# EAGLE board 2-28-13 x1_2 (EAGLE 6.3)
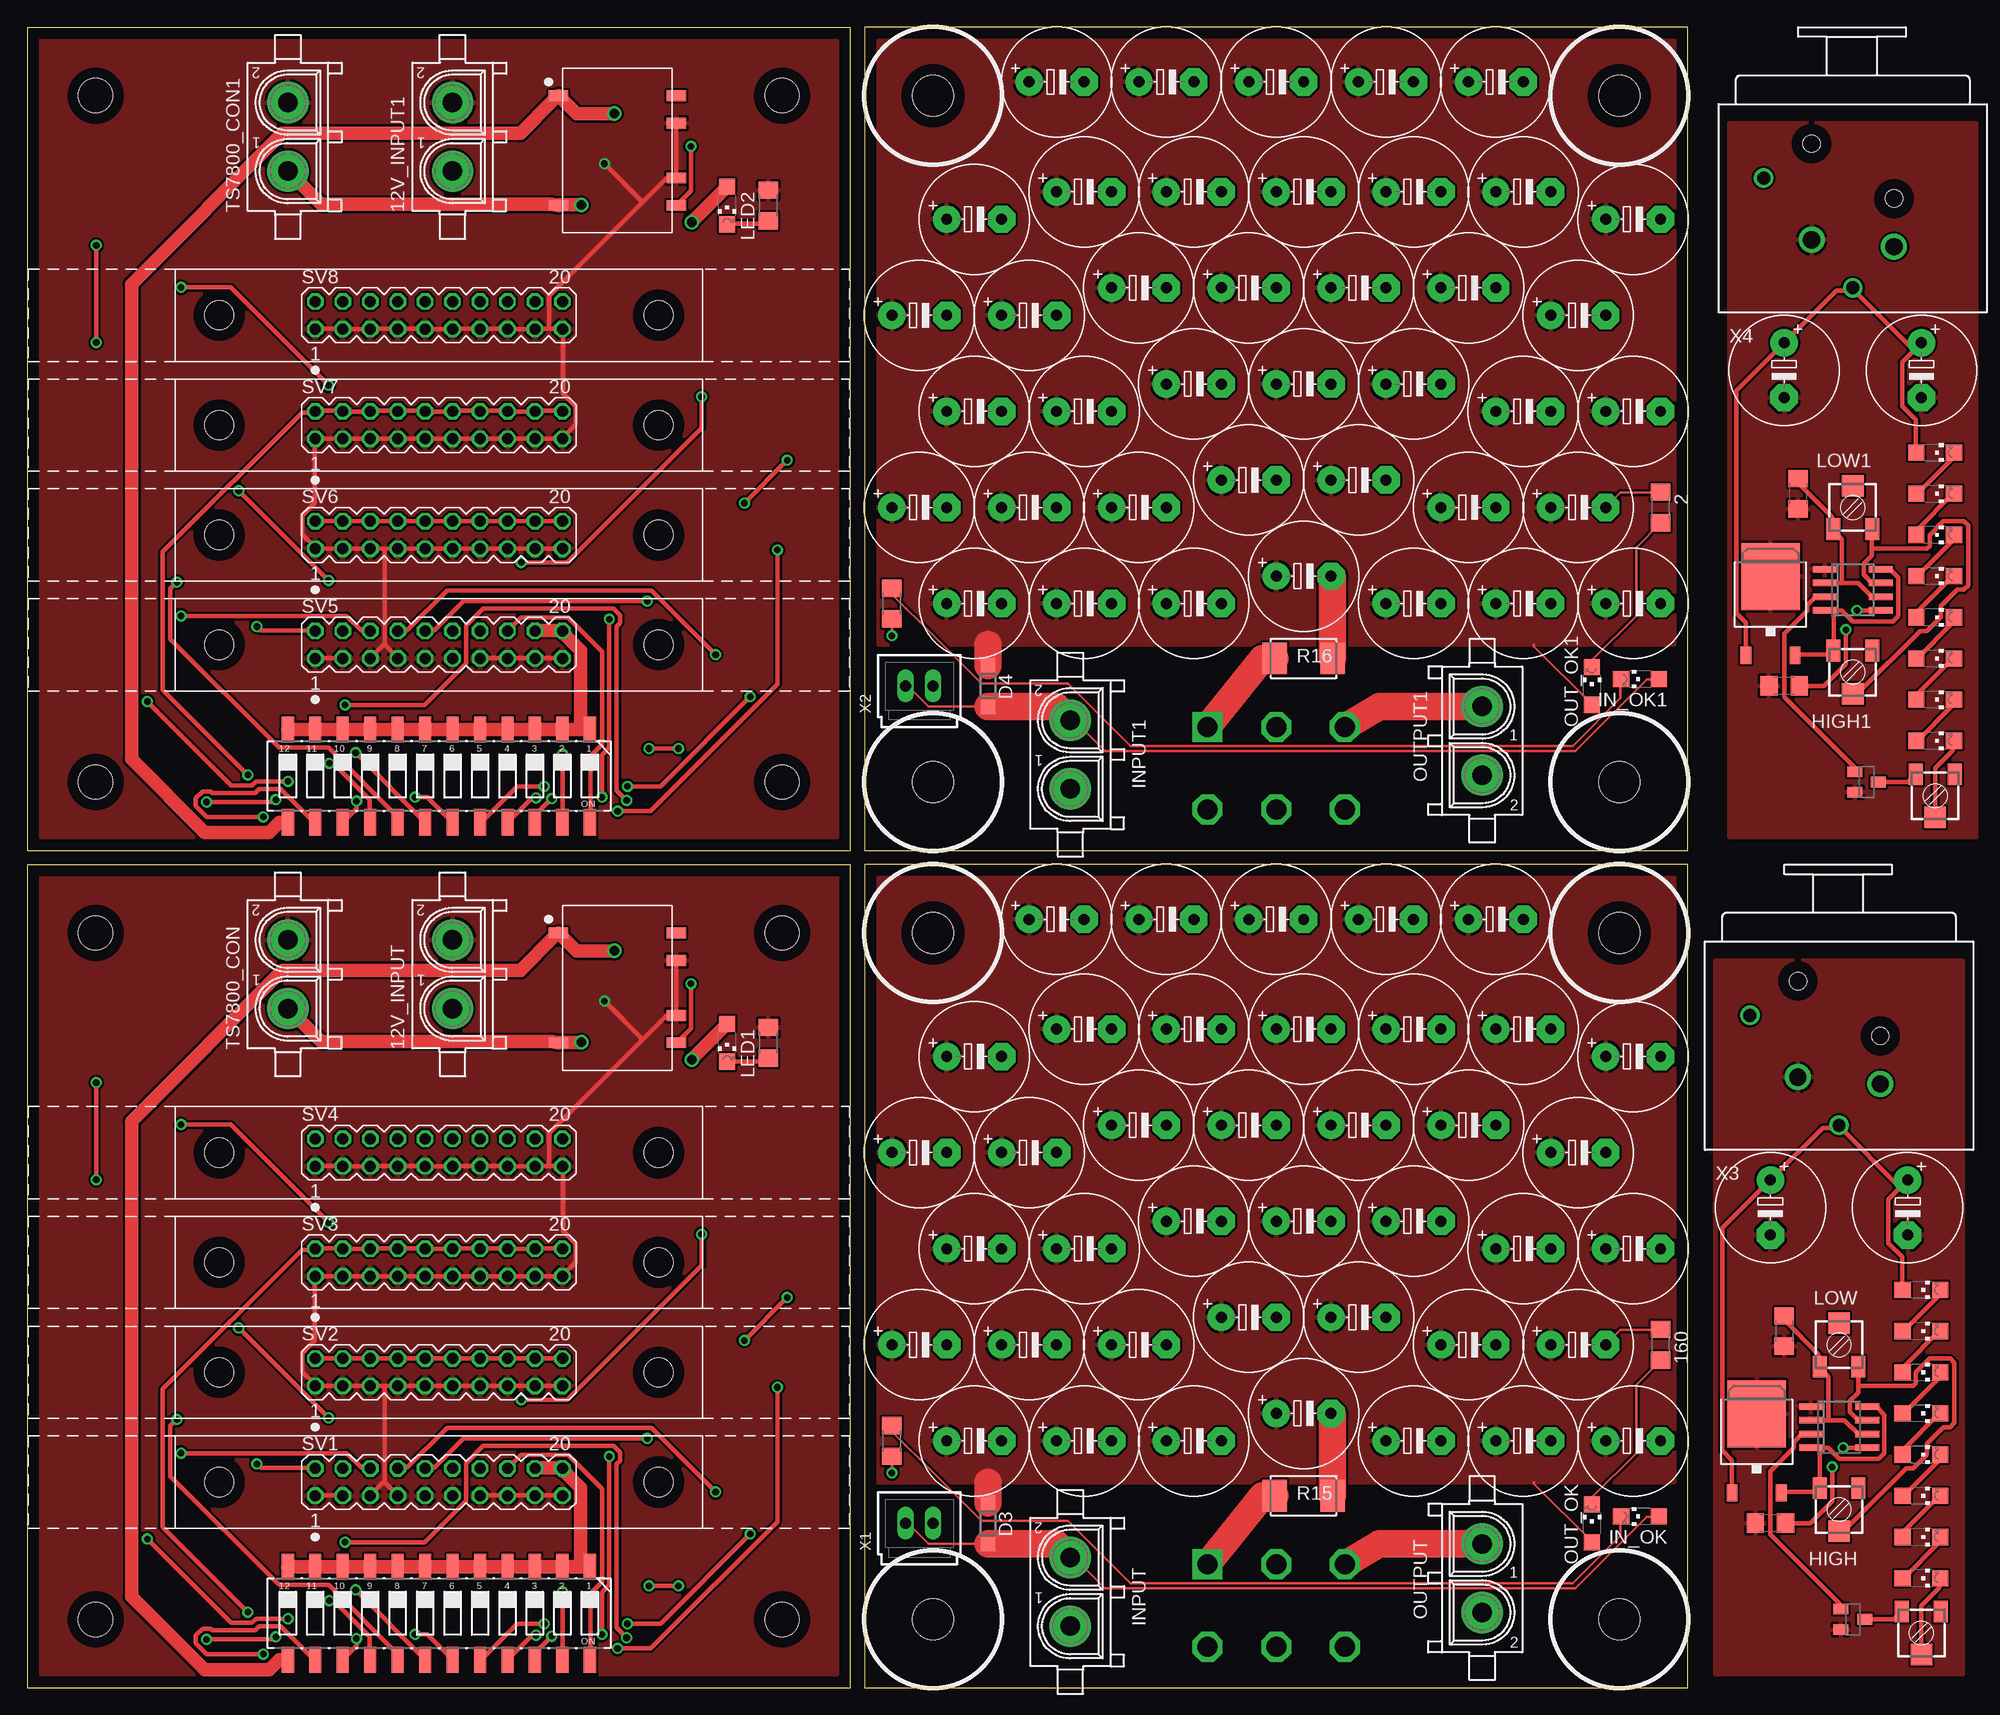
[diagram p0: board, top side]
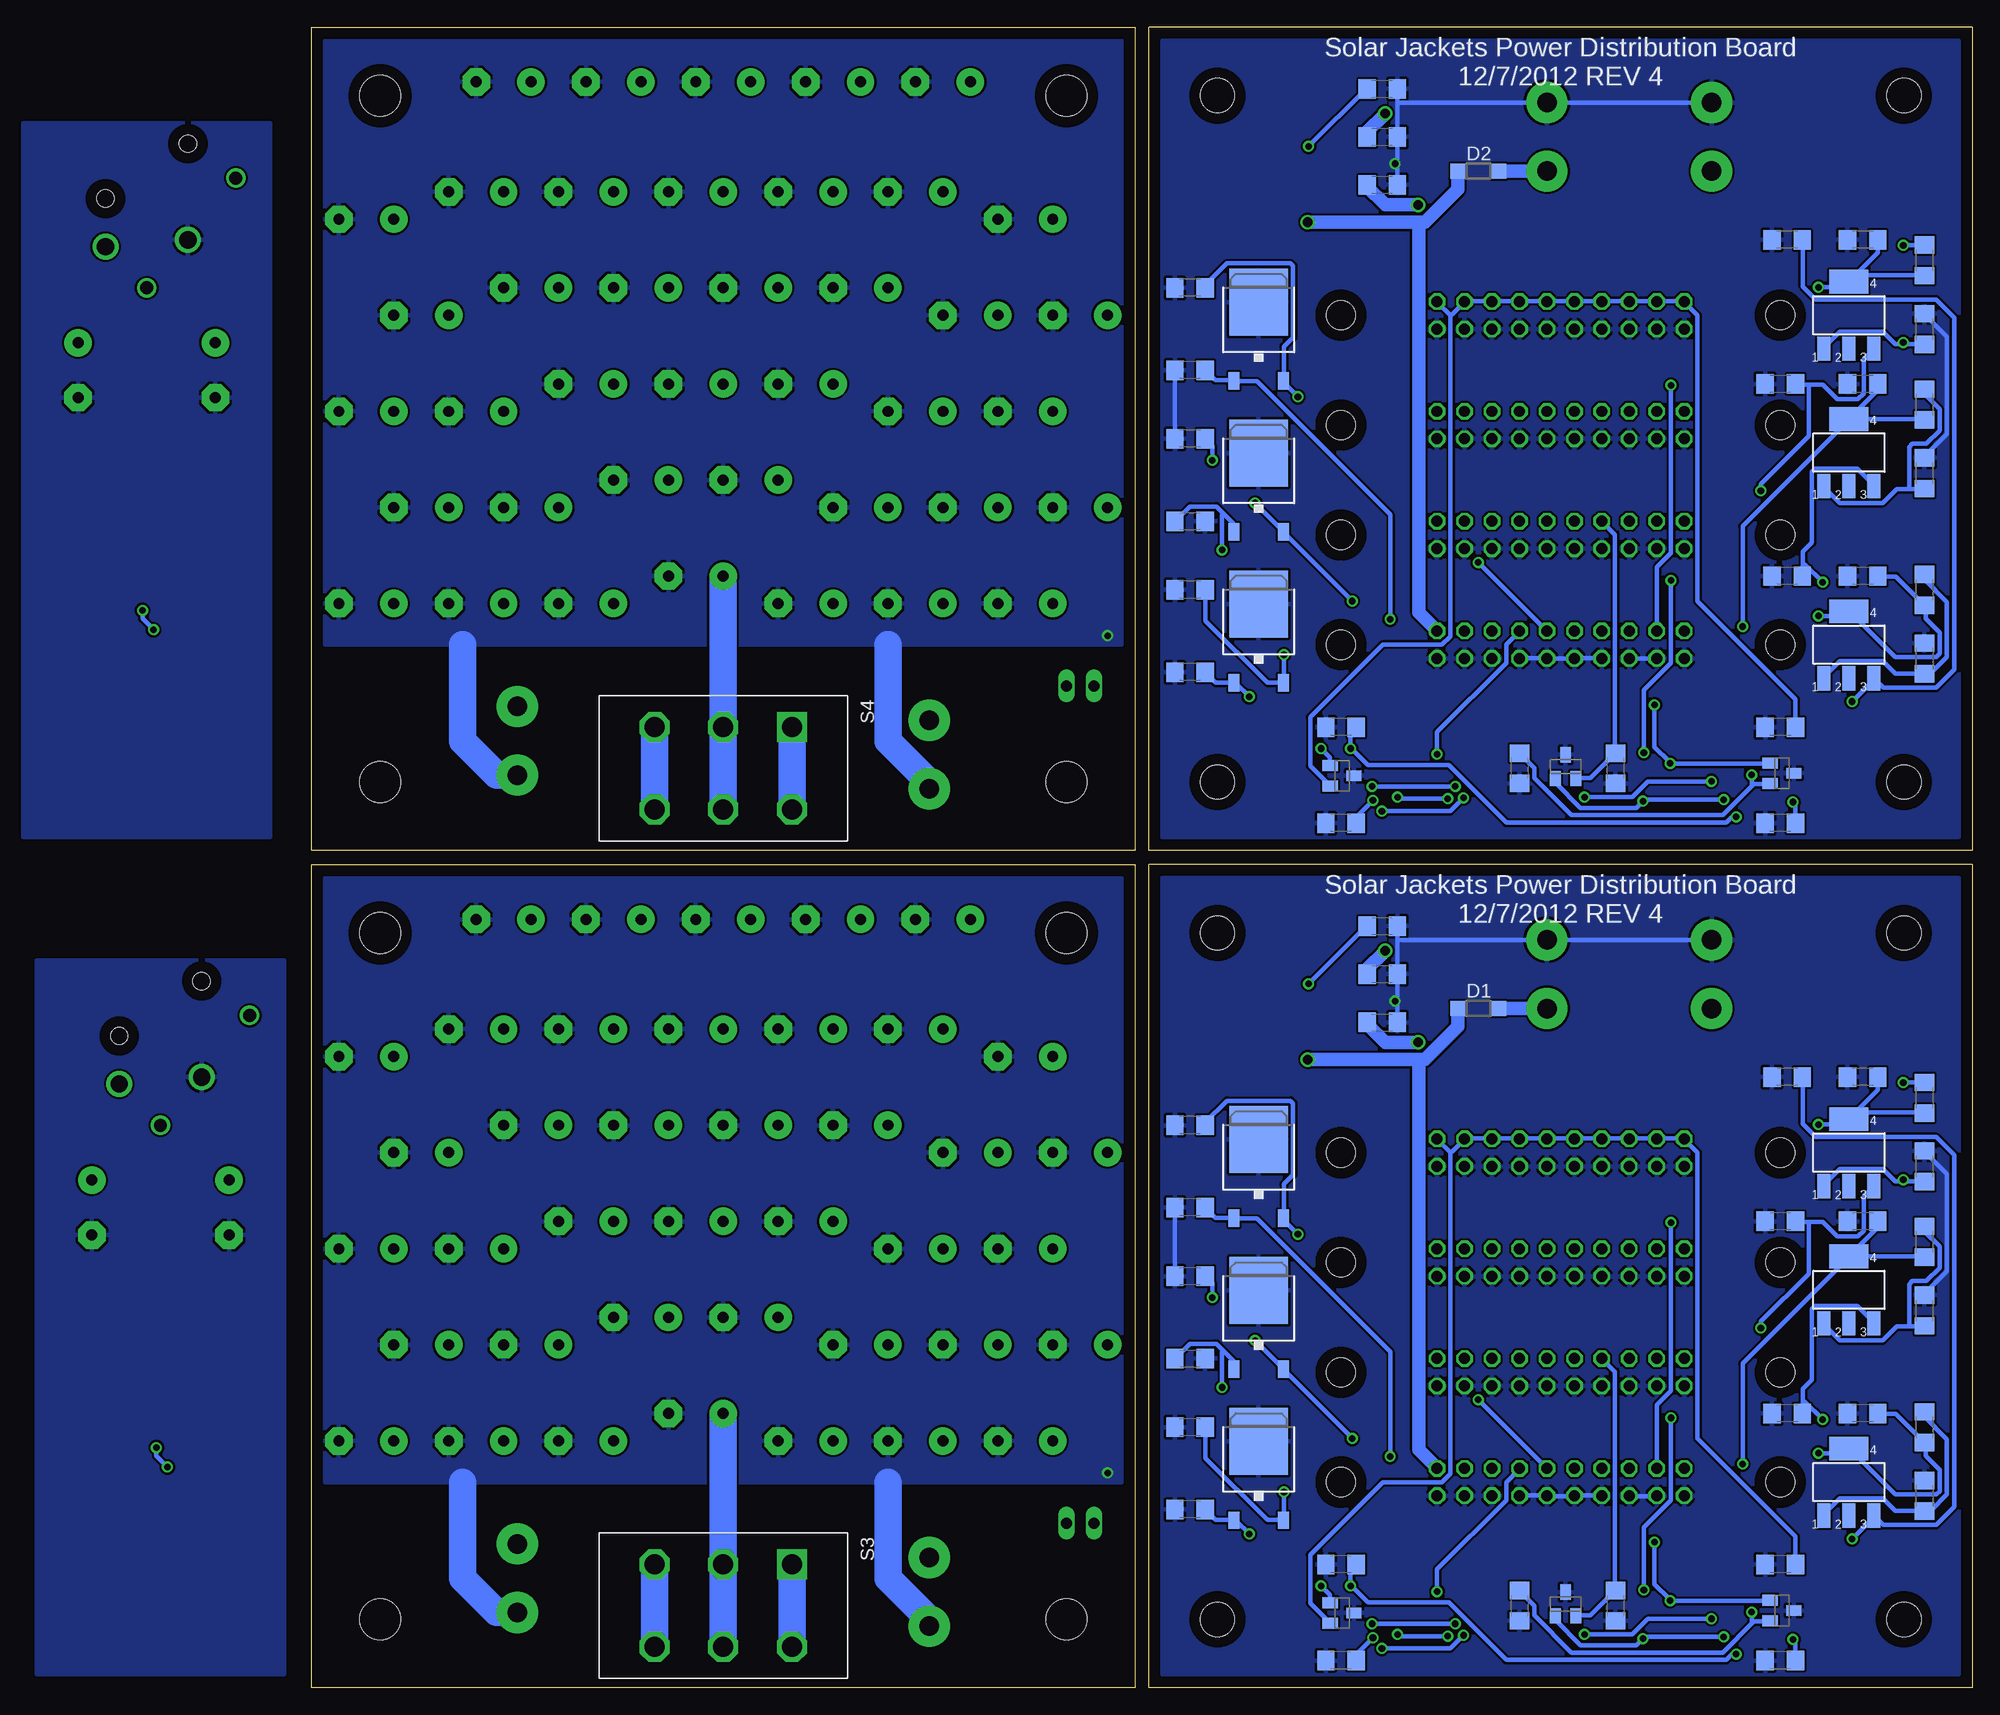
[diagram p1: board, bottom side, seen from below]

Size 153.67 x 153.67 mm. Coordinates in mm from the lower left corner, seen from the top.
Outline: 76.2,0 76.2,76.2 0,76.2 0,0 76.2,0
Outline: 76.2,77.47 76.2,153.67 0,153.67 0,77.47 76.2,77.47
Outline: 77.47,0 153.67,0 153.67,76.2 77.47,76.2 77.47,0
Outline: 77.47,77.47 153.67,77.47 153.67,153.67 77.47,153.67 77.47,77.47
Copper layers (1*16): Top 0.035mm / dielectric 1.5mm / Bottom 0.035mm
Design rules "default": minimum track width 10mil, minimum drill 24mil, track to track 8mil, track to pad 8mil, pad to pad 8mil, via to via 8mil, smd to smd 8mil, copper to edge 40mil, drill to drill 8mil, minimum pad ring 10mil, minimum via ring 8mil, stop-mask expansion 4mil, vias tented up to drill 0mil, thermal gap 10mil
Net classes: 1 power: width 1.27 mm, drill 0.889 mm
Holes 3.17 mm at 69.85,6.35 6.35,6.35 6.35,69.85 69.85,69.85 69.85,83.82 6.35,83.82 6.35,147.32 69.85,147.32
Holes 3.81 mm at 83.82,6.35 83.82,69.85 147.32,69.85 147.32,6.35 83.82,83.82 83.82,147.32 147.32,147.32 147.32,83.82

## Footprints (pad centres in the part's own frame; a part is rotated, then mirrored left to right if it is on the bottom)
R1206 = smd 1.6 x 1.803: 1 -1.422,0; 2 1.422,0
RTRIM3314J = smd 1.3 x 2: 1 -1.8,-2; 3 1.8,-2 | smd 2 x 2: 2 0,2
SOT23 = smd 1 x 1.4: 1 -0.95,-1.1; 2 0.95,-1.1; 3 0,1.1
350759-4 = drill 1.8 pad 3.81: 1 -3.175,0; 2 3.175,0
C1206 = smd 1.6 x 1.8: 1 -1.4,0; 2 1.4,0
E5-10,5 = drill 1.016 pad 2.54: + -2.54,0 | drill 1.016 pad 2.54 octagon: - 2.54,0
SOD123 = smd 1.4 x 1.4: A 1.9,0; C -1.9,0
SOT223 = smd 1.219 x 2.235: 1 -2.311,-3.099; 2 0,-3.099; 3 2.311,-3.099 | smd 3.6 x 2.2: 4 0,3.099
TO252 = smd 1 x 1.6: 1 -2.28,-4.8; 2 2.28,-4.8 | smd 5.4 x 6.2: 3 0,2.5
SO08 = smd 0.6 x 2.2: 1 -1.905,-2.6; 2 -0.635,-2.6; 3 0.635,-2.6; 4 1.905,-2.6; 5 1.905,2.6; 6 0.635,2.6; 7 -0.635,2.6; 8 -1.905,2.6
CHIPLED_1206 = smd 1.5 x 1.5: A 0,-1.75; C 0,1.75
350428-1 = drill 1.8 pad 3.81: 1 -3.175,0; 2 3.175,0
WSC2515 = smd 2.29 x 2.92: 1 -2.675,0; 2 2.675,0
CTS-219-12 = smd 1.13 x 2.44: 1 -13.97,-4.3; 2 -11.43,-4.3; 3 -8.89,-4.3; 4 -6.35,-4.3; 5 -3.81,-4.3; 6 -1.27,-4.3; 7 1.27,-4.3; 8 3.81,-4.3; 9 6.35,-4.3; 10 8.89,-4.3; 11 11.43,-4.3; 12 13.97,-4.3; 13 13.97,4.3; 14 11.43,4.3; 15 8.89,4.3; 16 6.35,4.3; 17 3.81,4.3; 18 1.27,4.3; 19 -1.27,4.3; 20 -3.81,4.3; 21 -6.35,4.3; 22 -8.89,4.3; 23 -11.43,4.3; 24 -13.97,4.3
SLIDE_SWITCH = drill 1.854 square: 1 -3.81,6.35 | drill 1.854 octagon: 2 -3.81,0; 3 -3.81,-6.35; 4 3.81,-6.35; 5 3.81,0; 6 3.81,6.35
MA10-2 = drill 1.016 octagon: 1 -11.43,-1.27; 2 -11.43,1.27; 3 -8.89,-1.27; 4 -8.89,1.27; 5 -6.35,-1.27; 6 -6.35,1.27; 7 -3.81,-1.27; 8 -3.81,1.27; 9 -1.27,-1.27; 10 -1.27,1.27; 11 1.27,-1.27; 12 1.27,1.27; 13 3.81,-1.27; 14 3.81,1.27; 15 6.35,-1.27; 16 6.35,1.27; 17 8.89,-1.27; 18 8.89,1.27; 19 11.43,-1.27; 20 11.43,1.27 | hole 2.692: -20.32,0; 20.32,0
V7805 = smd 0.991 x 1.803: 1 0,0.902; 5 10.16,0.902; 6 10.16,11.798; 7 7.62,11.798; 9 2.54,11.798; 10 0,11.798
70543-02 = drill 1.016 long: 1 -1.27,0; 2 1.27,0
NC3FAH2 = drill 1.6: 1 -3.81,0.635; 2 3.81,0 | drill 1.2: 3 0,-3.815; G -8.25,6.355 | hole 1.6: -3.81,9.525; 3.81,4.445

## Placement (x,y rotation side)
1  160  [R1206]  80.01,22.86 90 top
1K  10 k  [RTRIM3314J]  175.26,5.08 180 top  (outside the outline)
1K1  10 k  [RTRIM3314J]  176.53,82.55 180 top  (outside the outline)
2  [R1206]  151.13,109.22 270 top
3  160  [R1206]  80.01,100.33 90 top
3V1  MAX6103  [SOT23]  17.63,84.63 270 bottom
3V2  MAX6103  [SOT23]  37.64,85.24 0 bottom
3V3  MAX6103  [SOT23]  17.63,7.16 270 bottom
3V4  MAX6103  [SOT23]  37.64,7.77 0 bottom
3V5  MAX6103  [SOT23]  58.32,6.93 270 bottom
3V6  MAX6103  [SOT23]  58.32,84.4 270 bottom
12V_INPUT  350759-4  [350759-4]  39.37,66.04 90 top
12V_INPUT1  350759-4  [350759-4]  39.37,143.51 90 top
160  [R1206]  151.13,31.75 270 top
317CAP1  .33uF  [C1206]  17.14,133.99 180 bottom
317CAP2  1uF  [C1206]  10.16,102.87 180 bottom
317CAP3  .33uF  [C1206]  17.14,56.52 180 bottom
317CAP4  .33uF  [C1206]  17.78,120.65 180 bottom
317CAP5  1uF  [C1206]  10.16,133.99 180 bottom
317CAP6  .33uF  [C1206]  17.14,102.87 180 bottom
317CAP7  1uF  [C1206]  10.16,120.65 180 bottom
317CAP8  1uF  [C1206]  10.16,25.4 180 bottom
317CAP9  .33uF  [C1206]  17.78,43.18 180 bottom
317CAP10  1uF  [C1206]  10.16,56.52 180 bottom
317CAP11  .33uF  [C1206]  17.14,25.4 180 bottom
317CAP12  1uF  [C1206]  10.16,43.18 180 bottom
6103CAP1  1uF  [C1206]  58.42,80.01 180 bottom
6103CAP2  1uF  [C1206]  41.91,85.09 270 bottom
6103CAP3  1uF  [C1206]  17.78,80.01 180 bottom
6103CAP4  1uF  [C1206]  33.02,85.09 270 bottom
6103CAP5  1uF  [C1206]  58.42,88.9 180 bottom
6103CAP6  1uF  [C1206]  17.78,88.9 180 bottom
6103CAP7  1uF  [C1206]  58.42,2.54 180 bottom
6103CAP8  1uF  [C1206]  41.91,7.62 270 bottom
6103CAP9  1uF  [C1206]  17.78,2.54 180 bottom
6103CAP10  1uF  [C1206]  33.02,7.62 270 bottom
6103CAP11  1uF  [C1206]  58.42,11.43 180 bottom
6103CAP12  1uF  [C1206]  17.78,11.43 180 bottom
C1  1uF  [C1206]  72.39,44.45 180 bottom
C2  1uF  [C1206]  72.39,52.07 180 bottom
C3  1uF  [C1206]  72.39,30.48 0 bottom
C4  1uF  [C1206]  72.39,38.1 180 bottom
C5  1uF  [C1206]  72.39,16.51 180 bottom
C6  1uF  [C1206]  72.39,24.13 180 bottom
C7  1uF  [C1206]  72.39,121.92 180 bottom
C8  1uF  [C1206]  72.39,129.54 180 bottom
C9  1uF  [C1206]  72.39,107.95 0 bottom
C10  1uF  [C1206]  72.39,115.57 180 bottom
C11  1uF  [C1206]  72.39,101.6 180 bottom
C12  1uF  [C1206]  72.39,93.98 180 bottom
C13  [E5-10,5]  95.25,71.12 0 top
C14  [E5-10,5]  105.41,71.12 0 top
C15  [E5-10,5]  115.57,71.12 0 top
C16  [E5-10,5]  125.73,71.12 0 top
C17  [E5-10,5]  135.89,71.12 0 top
C18  [E5-10,5]  148.59,58.42 0 top
C19  [E5-10,5]  138.43,60.96 0 top
C20  [E5-10,5]  128.27,60.96 0 top
C21  [E5-10,5]  118.11,60.96 0 top
C22  [E5-10,5]  107.95,60.96 0 top
C23  [E5-10,5]  97.79,60.96 0 top
C24  [E5-10,5]  87.63,58.42 0 top
C25  [E5-10,5]  82.55,49.53 0 top
C26  [E5-10,5]  92.71,49.53 0 top
C27  [E5-10,5]  102.87,52.07 0 top
C28  [E5-10,5]  113.03,52.07 0 top
C29  [E5-10,5]  123.19,52.07 0 top
C30  [E5-10,5]  133.35,52.07 0 top
C31  [E5-10,5]  143.51,49.53 0 top
C32  [E5-10,5]  148.59,40.64 0 top
C33  [E5-10,5]  138.43,40.64 0 top
C34  [E5-10,5]  128.27,43.18 0 top
C35  [E5-10,5]  118.11,43.18 0 top
C36  [E5-10,5]  107.95,43.18 0 top
C37  [E5-10,5]  97.79,40.64 0 top
C38  [E5-10,5]  87.63,40.64 0 top
C39  [E5-10,5]  82.55,31.75 0 top
C40  [E5-10,5]  92.71,31.75 0 top
C41  [E5-10,5]  102.87,31.75 0 top
C42  [E5-10,5]  113.03,34.29 0 top
C43  [E5-10,5]  123.19,34.29 0 top
C44  [E5-10,5]  133.35,31.75 0 top
C45  [E5-10,5]  143.51,31.75 0 top
C46  [E5-10,5]  148.59,22.86 0 top
C47  [E5-10,5]  138.43,22.86 0 top
C48  [E5-10,5]  128.27,22.86 0 top
C49  [E5-10,5]  118.11,25.4 0 top
C50  [E5-10,5]  107.95,22.86 0 top
C51  [E5-10,5]  97.79,22.86 0 top
C52  [E5-10,5]  87.63,22.86 0 top
C53  [E5-10,5]  95.25,148.59 0 top
C54  [E5-10,5]  105.41,148.59 0 top
C55  [E5-10,5]  115.57,148.59 0 top
C56  [E5-10,5]  125.73,148.59 0 top
C57  [E5-10,5]  135.89,148.59 0 top
C58  [E5-10,5]  148.59,135.89 0 top
C59  [E5-10,5]  138.43,138.43 0 top
C60  [E5-10,5]  128.27,138.43 0 top
C61  [E5-10,5]  118.11,138.43 0 top
C62  [E5-10,5]  107.95,138.43 0 top
C63  [E5-10,5]  97.79,138.43 0 top
C64  [E5-10,5]  87.63,135.89 0 top
C65  [E5-10,5]  82.55,127 0 top
C66  [E5-10,5]  92.71,127 0 top
C67  [E5-10,5]  102.87,129.54 0 top
C68  [E5-10,5]  113.03,129.54 0 top
C69  [E5-10,5]  123.19,129.54 0 top
C70  [E5-10,5]  133.35,129.54 0 top
C71  [E5-10,5]  143.51,127 0 top
C72  [E5-10,5]  148.59,118.11 0 top
C73  [E5-10,5]  138.43,118.11 0 top
C74  [E5-10,5]  128.27,120.65 0 top
C75  [E5-10,5]  118.11,120.65 0 top
C76  [E5-10,5]  107.95,120.65 0 top
C77  [E5-10,5]  97.79,118.11 0 top
C78  [E5-10,5]  87.63,118.11 0 top
C79  [E5-10,5]  82.55,109.22 0 top
C80  [E5-10,5]  92.71,109.22 0 top
C81  [E5-10,5]  102.87,109.22 0 top
C82  [E5-10,5]  113.03,111.76 0 top
C83  [E5-10,5]  123.19,111.76 0 top
C84  [E5-10,5]  133.35,109.22 0 top
C85  [E5-10,5]  143.51,109.22 0 top
C86  [E5-10,5]  148.59,100.33 0 top
C87  [E5-10,5]  138.43,100.33 0 top
C88  [E5-10,5]  128.27,100.33 0 top
C89  [E5-10,5]  118.11,102.87 0 top
C90  [E5-10,5]  107.95,100.33 0 top
C91  [E5-10,5]  97.79,100.33 0 top
C92  [E5-10,5]  87.63,100.33 0 top
C93  100uF  [C1206]  162.56,33.02 270 top  (outside the outline)
C94  10nF  [C1206]  161.29,15.24 180 top  (outside the outline)
C95  2.2F  [E5-10,5]  173.99,44.45 270 top  (outside the outline)
C96  2.2F  [E5-10,5]  161.29,44.45 270 top  (outside the outline)
C97  100uF  [C1206]  163.83,110.49 270 top  (outside the outline)
C98  10nF  [C1206]  162.56,92.71 180 top  (outside the outline)
C99  2.2F  [E5-10,5]  175.26,121.92 270 top  (outside the outline)
C100  2.2F  [E5-10,5]  162.56,121.92 270 top  (outside the outline)
D1  [SOD123]  45.72,62.87 0 bottom
D2  [SOD123]  45.72,140.34 0 bottom
D3  [SOD123]  88.9,15.24 270 top
D4  [SOD123]  88.9,92.71 270 top
HIGH  10k  [RTRIM3314J]  167.64,16.51 180 top  (outside the outline)
HIGH1  10k  [RTRIM3314J]  168.91,93.98 180 top  (outside the outline)
IC1  LM317  [SOT223]  11.43,96.52 0 bottom
IC2  LM317  [SOT223]  11.43,127 0 bottom
IC3  LM317  [SOT223]  11.43,114.3 0 bottom
IC4  LM317  [SOT223]  11.43,19.05 0 bottom
IC5  LM317  [SOT223]  11.43,49.53 0 bottom
IC6  LM317  [SOT223]  11.43,36.83 0 bottom
IC7  7805DT  [TO252]  160.02,22.86 0 top  (outside the outline)
IC8  LM555D  [SO08]  167.64,24.13 270 top  (outside the outline)
IC9  7805DT  [TO252]  161.29,100.33 0 top  (outside the outline)
IC10  LM555D  [SO08]  168.91,101.6 270 top  (outside the outline)
IN_OK  [CHIPLED_1206]  149.22,15.88 90 top
IN_OK1  [CHIPLED_1206]  149.22,93.34 90 top
INPUT  350428-1  [350428-1]  96.52,8.89 90 top
INPUT1  350428-1  [350428-1]  96.52,86.36 90 top
LED1  [CHIPLED_1206]  64.77,59.69 180 top
LED2  [CHIPLED_1206]  64.77,137.16 180 top
LED3  [CHIPLED_1206]  175.26,36.83 270 top  (outside the outline)
LED4  [CHIPLED_1206]  175.26,33.02 270 top  (outside the outline)
LED5  [CHIPLED_1206]  175.26,29.21 270 top  (outside the outline)
LED6  [CHIPLED_1206]  175.26,25.4 270 top  (outside the outline)
LED7  [CHIPLED_1206]  175.26,21.59 270 top  (outside the outline)
LED8  [CHIPLED_1206]  175.26,13.97 270 top  (outside the outline)
LED9  [CHIPLED_1206]  175.26,17.78 270 top  (outside the outline)
LED10  [CHIPLED_1206]  175.26,10.16 270 top  (outside the outline)
LED11  [CHIPLED_1206]  176.53,114.3 270 top  (outside the outline)
LED12  [CHIPLED_1206]  176.53,110.49 270 top  (outside the outline)
LED13  [CHIPLED_1206]  176.53,106.68 270 top  (outside the outline)
LED14  [CHIPLED_1206]  176.53,102.87 270 top  (outside the outline)
LED15  [CHIPLED_1206]  176.53,99.06 270 top  (outside the outline)
LED16  [CHIPLED_1206]  176.53,91.44 270 top  (outside the outline)
LED17  [CHIPLED_1206]  176.53,95.25 270 top  (outside the outline)
LED18  [CHIPLED_1206]  176.53,87.63 270 top  (outside the outline)
LOW  10k  [RTRIM3314J]  167.64,31.75 0 top  (outside the outline)
LOW1  10k  [RTRIM3314J]  168.91,109.22 0 top  (outside the outline)
OUT_OK  [CHIPLED_1206]  144.78,15.24 0 top
OUT_OK1  [CHIPLED_1206]  144.78,92.71 0 top
OUTPUT  350428-1  [350428-1]  134.62,10.16 270 top
OUTPUT1  350428-1  [350428-1]  134.62,87.63 270 top
PWR_1  7805DT  [TO252]  66.04,48.26 0 bottom
PWR_2  7805DT  [TO252]  66.04,34.29 0 bottom
PWR_3  7805DT  [TO252]  66.04,20.32 0 bottom
PWR_4  7805DT  [TO252]  66.04,125.73 0 bottom
PWR_5  7805DT  [TO252]  66.04,111.76 0 bottom
PWR_6  7805DT  [TO252]  66.04,97.79 0 bottom
R1  430  [R1206]  68.58,59.69 90 top
R2  220  [R1206]  4.45,101.6 90 bottom
R3  361  [R1206]  4.45,95.25 90 bottom
R4  220  [R1206]  4.45,132.08 90 bottom
R5  361  [R1206]  4.45,125.73 90 bottom
R6  220  [R1206]  4.45,118.75 90 bottom
R7  220  [R1206]  4.45,24.13 90 bottom
R8  361  [R1206]  4.45,17.78 90 bottom
R9  220  [R1206]  4.45,54.61 90 bottom
R10  361  [R1206]  4.45,48.26 90 bottom
R11  220  [R1206]  4.45,41.27 90 bottom
R12  361  [R1206]  4.45,34.92 90 bottom
R13  361  [R1206]  4.45,112.39 90 bottom
R14  430  [R1206]  68.58,137.16 90 top
R15  50 1W  [WSC2515]  118.11,17.78 0 top
R16  50 1W  [WSC2515]  118.11,95.25 0 top
S1  219-12  [CTS-219-12]  38.1,6.91 180 top
S2  219-12  [CTS-219-12]  38.1,84.38 180 top
S3  [SLIDE_SWITCH]  115.57,7.62 270 bottom
S4  [SLIDE_SWITCH]  115.57,85.09 270 bottom
SV1  AMPLATCH-20  [MA10-2]  38.1,19.05 0 top
SV2  AMPLATCH-20  [MA10-2]  38.1,29.21 0 top
SV3  AMPLATCH-20  [MA10-2]  38.1,39.37 0 top
SV4  AMPLATCH-20  [MA10-2]  38.1,49.53 0 top
SV5  AMPLATCH-20  [MA10-2]  38.1,96.52 0 top
SV6  AMPLATCH-20  [MA10-2]  38.1,106.68 0 top
SV7  AMPLATCH-20  [MA10-2]  38.1,116.84 0 top
SV8  AMPLATCH-20  [MA10-2]  38.1,127 0 top
TS7800_CON  350759-4  [350759-4]  24.13,66.04 90 top
TS7800_CON1  350759-4  [350759-4]  24.13,143.51 90 top
U$1  V7805  [V7805]  48.26,147.32 270 top
U$2  V7805  [V7805]  48.26,69.85 270 top
U$3  PMV56XN215  [SOT23]  168.91,6.35 270 top  (outside the outline)
U$4  PMV56XN215  [SOT23]  170.18,83.82 270 top  (outside the outline)
V7805_C1  1uF  [C1206]  54.61,147.96 0 bottom
V7805_C2  1uF  [C1206]  54.61,143.51 0 bottom
V7805_C3  1uF  [C1206]  54.61,139.06 0 bottom
V7805_C4  1uF  [C1206]  54.61,70.48 0 bottom
V7805_C5  1uF  [C1206]  54.61,66.04 0 bottom
V7805_C6  1uF  [C1206]  54.61,61.59 0 bottom
X1  C-GRID-02-70543  [70543-02]  82.55,15.24 0 top
X2  C-GRID-02-70543  [70543-02]  82.55,92.71 0 top
X3  NC3FAH2  [NC3FAH2]  167.64,55.88 0 top  (outside the outline)
X4  NC3FAH2  [NC3FAH2]  168.91,133.35 0 top  (outside the outline)

## Library data of the parts
1-3 160 317CAP1-317CAP12 6103CAP1-6103CAP12 C1-C100 R1-R16 V7805_C1-V7805_C6 = rcl
1K 1K1 HIGH HIGH1 LOW LOW1 = resistor
3V1-3V6 = SolarJacketsADC
12V_INPUT 12V_INPUT1 INPUT INPUT1 OUTPUT OUTPUT1 = con-amp
D1-D4 = diode
IC1-IC10 PWR_1-PWR_6 = linear
IN_OK IN_OK1 LED1-LED18 OUT_OK OUT_OK1 = led
S1 S2 = switch-dil; OC_FARNELL: unknown; OC_NEWARK: unknown
S3 S4 = SolarJackets_Common
SV1-SV8 = SolarJacketsADC; PART_NUM: 5499160-1
TS7800_CON TS7800_CON1 = con-amp; NEG: -; POS: +
U$1 U$2 = V7805
U$3 U$4 = SolarJacketsADC; PART_NUM: PMV56XN,215
X1 X2 = con-molex; OC_FARNELL: unknown; OC_NEWARK: unknown
X3 X4 = con-neutrik_ag; MPN: NC3FAH2; OC_FARNELL: unknown; OC_NEWARK: 27B4208

## Nets
3.3V1: 317CAP8.1 IC4.4 R7.1 SV1.6
3.3V1_EN: 317CAP3.1 IC4.3 S1.19
3.3V1_EN1: 317CAP1.1 IC1.3 S2.19
3.3V2: 317CAP10.1 IC5.4 R9.1 SV1.4
3.3V2_EN: 317CAP9.1 IC5.3 S1.18
3.3V2_EN1: 317CAP4.1 IC2.3 S2.18
3.3V3: 317CAP12.1 IC6.4 R11.1 SV1.2
3.3V3_EN: 317CAP11.1 IC6.3 S1.17
3.3V3_EN1: 317CAP6.1 IC3.3 S2.17
3.3V4: 317CAP7.1 IC3.4 R6.1 SV5.2
3.3V5: 317CAP2.1 IC1.4 R2.1 SV5.6
3.3V6: 317CAP5.1 IC2.4 R4.1 SV5.4
5V: C13.+ C14.+ C15.+ C16.+ C17.+ C18.+ C19.+ C20.+ C21.+ C22.+ C23.+ C24.+ C25.+ C26.+ C27.+ C28.+ C29.+ C30.+ C31.+ C32.+ C33.+ C34.+ C35.+ C36.+ C37.+ C38.+ C39.+ C40.+ C41.+ C42.+ C43.+ C44.+ C45.+ C46.+ C47.+ C48.+ C49.+ C50.+ C51.+ C52.+ D3.C OUT_OK.A S3.2 S3.5
5V1: C2.1 PWR_1.2 SV1.12
5V1_EN: C1.1 PWR_1.1 S1.22
5V1_EN1: C7.1 PWR_4.1 S2.22
5V2: C4.1 PWR_2.2 SV1.10
5V2_EN: C3.1 PWR_2.1 S1.21
5V2_EN1: C9.1 PWR_5.1 S2.21
5V3: C6.1 PWR_3.2 SV1.8
5V3_EN: C5.1 PWR_3.1 S1.20
5V3_EN1: C12.1 PWR_6.1 S2.20
5V4: C11.1 PWR_6.2 SV5.8
5V5: C10.1 PWR_5.2 SV5.10
5V6: C8.1 PWR_4.2 SV5.12
5V7: C53.+ C54.+ C55.+ C56.+ C57.+ C58.+ C59.+ C60.+ C61.+ C62.+ C63.+ C64.+ C65.+ C66.+ C67.+ C68.+ C69.+ C70.+ C71.+ C72.+ C73.+ C74.+ C75.+ C76.+ C77.+ C78.+ C79.+ C80.+ C81.+ C82.+ C83.+ C84.+ C85.+ C86.+ C87.+ C88.+ C89.+ C90.+ C91.+ C92.+ D4.C OUT_OK1.A S4.2 S4.5
12V [power]: D1.C LED1.A S1.1 S1.2 S1.3 S1.4 S1.5 S1.6 S1.7 S1.8 S1.9 S1.10 S1.11 S1.12 SV1.18 SV1.20
12V1 [power]: D2.C LED2.A S2.1 S2.2 S2.3 S2.4 S2.5 S2.6 S2.7 S2.8 S2.9 S2.10 S2.11 S2.12 SV5.18 SV5.20
12V1_EN: S1.24 SV1.16
12V1_EN1: S2.24 SV5.16
12V2_EN: S1.23 SV1.14
12V2_EN1: S2.23 SV5.14
24V: C95.+ C96.+ IC7.1 LED3.A X3.3
24V1: C99.+ C100.+ IC9.1 LED11.A X4.3
+5V: HIGH.3 IC7.2 IC8.4 IC8.8
+5V1: HIGH1.3 IC9.2 IC10.4 IC10.8
GND: 3V3.3 3V4.3 3V5.3 12V_INPUT.2 317CAP3.2 317CAP8.2 317CAP9.2 317CAP10.2 317CAP11.2 317CAP12.2 6103CAP7.2 6103CAP8.2 6103CAP9.2 6103CAP10.2 6103CAP11.2 6103CAP12.2 C1.2 C2.2 C3.2 C4.2 C5.2 C6.2 PWR_1.3 PWR_2.3 PWR_3.3 R1.2 R8.2 R10.2 R12.2 SV1.1 SV1.3 SV1.5 SV1.7 SV1.9 SV1.11 SV1.13 SV1.15 SV1.17 SV1.19 SV2.1 SV2.3 SV2.5 SV2.7 SV2.9 SV2.11 SV2.13 SV2.15 SV2.17 SV2.19 SV3.1 SV3.3 SV3.5 SV3.7 SV3.9 SV3.11 SV3.13 SV3.15 SV3.17 SV3.19 SV4.1 SV4.3 SV4.5 SV4.7 SV4.9 SV4.11 SV4.13 SV4.15 SV4.17 SV4.19 TS7800_CON.2 U$2.7 U$2.9 V7805_C4.2 V7805_C5.2 V7805_C6.2
GND1: 3V1.3 3V2.3 3V6.3 12V_INPUT1.2 317CAP1.2 317CAP2.2 317CAP4.2 317CAP5.2 317CAP6.2 317CAP7.2 6103CAP1.2 6103CAP2.2 6103CAP3.2 6103CAP4.2 6103CAP5.2 6103CAP6.2 C7.2 C8.2 C9.2 C10.2 C11.2 C12.2 PWR_4.3 PWR_5.3 PWR_6.3 R3.2 R5.2 R13.2 R14.2 SV5.1 SV5.3 SV5.5 SV5.7 SV5.9 SV5.11 SV5.13 SV5.15 SV5.17 SV5.19 SV6.1 SV6.3 SV6.5 SV6.7 SV6.9 SV6.11 SV6.13 SV6.15 SV6.17 SV6.19 SV7.1 SV7.3 SV7.5 SV7.7 SV7.9 SV7.11 SV7.13 SV7.15 SV7.17 SV7.19 SV8.1 SV8.3 SV8.5 SV8.7 SV8.9 SV8.11 SV8.13 SV8.15 SV8.17 SV8.19 TS7800_CON1.2 U$1.7 U$1.9 V7805_C1.2 V7805_C2.2 V7805_C3.2
GND2: 1.1 160.1 C13.- C14.- C15.- C16.- C17.- C18.- C19.- C20.- C21.- C22.- C23.- C24.- C25.- C26.- C27.- C28.- C29.- C30.- C31.- C32.- C33.- C34.- C35.- C36.- C37.- C38.- C39.- C40.- C41.- C42.- C43.- C44.- C45.- C46.- C47.- C48.- C49.- C50.- C51.- C52.- INPUT.1 OUTPUT.2 R15.2
GND3: 2.1 3.1 C53.- C54.- C55.- C56.- C57.- C58.- C59.- C60.- C61.- C62.- C63.- C64.- C65.- C66.- C67.- C68.- C69.- C70.- C71.- C72.- C73.- C74.- C75.- C76.- C77.- C78.- C79.- C80.- C81.- C82.- C83.- C84.- C85.- C86.- C87.- C88.- C89.- C90.- C91.- C92.- INPUT1.1 OUTPUT1.2 R16.2
GND4: C93.2 C94.2 C95.- C96.- IC7.3 IC8.1 U$3.2 X3.1
GND5: C97.2 C98.2 C99.- C100.- IC9.3 IC10.1 U$4.2 X4.1
N$1: U$2.6 V7805_C4.1
N$2: LED1.C R1.1
N$3: 12V_INPUT.1 D1.A
N$4: IC1.1 R2.2 R3.1
N$5: IC2.1 R4.2 R5.1
N$6: IC3.1 R6.2 R13.1
N$7: U$1.6 V7805_C1.1
N$8: LED2.C R14.1
N$9: 12V_INPUT1.1 D2.A
N$10: 160.2 OUT_OK.C
N$11: OUTPUT.1 S3.3 S3.4
N$12: IC4.1 R7.2 R8.1
N$13: IC5.1 R9.2 R10.1
N$14: IC6.1 R11.2 R12.1
N$15: D3.A IN_OK.A INPUT.2 X1.1
N$16: R15.1 S3.1 S3.6
N$17: 1.2 IN_OK.C
N$18: 2.2 OUT_OK1.C
N$19: OUTPUT1.1 S4.3 S4.4
N$20: D4.A IN_OK1.A INPUT1.2 X2.1
N$21: R16.1 S4.1 S4.6
N$22: 3.2 IN_OK1.C
N$23: LED3.C LED4.A
N$24: LED4.C LED5.A
N$25: LED5.C LED6.A
N$26: LED6.C LED7.A
N$27: LED7.C LED9.A
N$28: LED8.A LED9.C
N$29: LED8.C LED10.A
N$30: 1K.2 LED10.C
N$31: HIGH.2 IC8.7 LOW.3
N$32: C93.1 IC8.2 IC8.6 LOW.1
N$33: C94.1 IC8.5
N$34: 1K.3 U$3.3
N$35: IC8.3 U$3.1
N$36: LED11.C LED12.A
N$37: LED12.C LED13.A
N$38: LED13.C LED14.A
N$39: LED14.C LED15.A
N$40: LED15.C LED17.A
N$41: LED16.A LED17.C
N$42: LED16.C LED18.A
N$43: 1K1.2 LED18.C
N$44: HIGH1.2 IC10.7 LOW1.3
N$45: C97.1 IC10.2 IC10.6 LOW1.1
N$46: C98.1 IC10.5
N$47: 1K1.3 U$4.3
N$48: IC10.3 U$4.1
TS7800_+ [power]: TS7800_CON.1 U$2.5 V7805_C6.1
TS7800_+1 [power]: TS7800_CON1.1 U$1.5 V7805_C3.1
TS7800_EN [power]: S1.13 U$2.1 V7805_C5.1
TS7800_EN1 [power]: S2.13 U$1.1 V7805_C2.1
VREF1: 3V3.2 6103CAP8.1 SV3.2 SV3.4 SV3.6 SV3.8 SV3.10 SV3.12 SV3.14 SV3.16 SV3.18 SV3.20
VREF1_EN: 3V3.1 6103CAP7.1 S1.16
VREF1_EN1: 3V1.1 6103CAP1.1 S2.16
VREF2: 3V4.2 6103CAP10.1 SV2.2 SV2.4 SV2.6 SV2.8 SV2.10 SV2.12 SV2.14 SV2.16 SV2.18 SV2.20
VREF2_EN: 3V4.1 6103CAP9.1 S1.15
VREF2_EN1: 3V2.1 6103CAP3.1 S2.15
VREF3: 3V5.2 6103CAP12.1 SV4.2 SV4.4 SV4.6 SV4.8 SV4.10 SV4.12 SV4.14 SV4.16 SV4.18 SV4.20
VREF3_EN: 3V5.1 6103CAP11.1 S1.14
VREF3_EN1: 3V6.1 6103CAP5.1 S2.14
VREF4: 3V1.2 6103CAP2.1 SV7.2 SV7.4 SV7.6 SV7.8 SV7.10 SV7.12 SV7.14 SV7.16 SV7.18 SV7.20
VREF5: 3V2.2 6103CAP4.1 SV6.2 SV6.4 SV6.6 SV6.8 SV6.10 SV6.12 SV6.14 SV6.16 SV6.18 SV6.20
VREF6: 3V6.2 6103CAP6.1 SV8.2 SV8.4 SV8.6 SV8.8 SV8.10 SV8.12 SV8.14 SV8.16 SV8.18 SV8.20

## Tracks (layer width: path | path; a pad name or v marks a point on that pad's centre or on a via)
3.3V1  (via drill 0.61)
  Top 0.406: v14.25,21.72 29.57,21.72 30.94,20.34 31.7,20.34 SV1.6
  Bottom 0.406: 317CAP8.1 8.69,25.38 7.09,25.38 4.5,22.78 R7.1 4.34,22.55 4.34,21.49 3.05,20.19 3.05,18.21 3.35,17.91 7.16,17.91 11.28,22.02 IC4.4 11.43,22.1 11.81,21.72 v14.25,21.72
3.3V1_EN  (via drill 0.61)
  Top 0.406: v35.89,4.95 37.03,4.95 39.32,2.67 S1.19 | v24.16,6.4 21.18,6.4 20.8,6.02 18.9,6.02 v11.12,13.79
  Bottom 0.406: 317CAP3.1 15.7,56.46 15.7,52.2 14.48,50.98 3.35,50.98 1.68,49.3 1.68,16.76 3.35,15.09 8.23,15.09 9.07,15.93 IC4.3 9.14,15.77 v11.12,13.79 | v35.89,4.95 31.47,4.95 30.02,6.4 v24.16,6.4
3.3V1_EN1  (via drill 0.61)
  Top 0.406: v35.89,82.42 37.03,82.42 39.32,80.14 S2.19 | v24.16,83.87 21.18,83.87 20.8,83.49 18.9,83.49 v11.12,91.26
  Bottom 0.406: 317CAP1.1 15.7,133.93 15.7,129.67 14.48,128.45 3.35,128.45 1.68,126.77 1.68,94.23 3.35,92.56 8.23,92.56 9.07,93.4 IC1.3 9.14,93.24 v11.12,91.26 | v35.89,82.42 31.47,82.42 30.02,83.87 v24.16,83.87
3.3V2  (via drill 0.61)
  Top 0.406: v27.89,43.05 18.82,52.12 v14.25,52.12
  Bottom 0.406: 317CAP10.1 8.76,56.46 8.76,55.32 11.43,52.65 IC5.4 | R9.1 4.5,53.26 10.59,53.26 IC5.4 | v27.89,43.05 27.89,27.51 29.18,26.21 29.18,20.34 SV1.4 | v14.25,52.12 11.96,52.12 11.58,52.5 IC5.4
3.3V2_EN  (via drill 0.61)
  Top 0.406: v30.4,9.07 36.8,2.67 S1.18 | v19.58,33.3 v27.89,24.99
  Bottom 0.406: 15.16,43.13 13.87,43.13 12.5,41.76 10.59,41.76 10.06,42.29 10.06,45.49 IC5.3 | 15.16,43.13 16.31,43.13 317CAP9.1 | v30.4,9.07 30.4,14.86 27.89,17.37 v27.89,24.99 | v19.58,33.3 19.58,33.91 15.16,38.33 15.16,43.13
3.3V2_EN1  (via drill 0.61)
  Top 0.406: v30.4,86.54 36.8,80.14 S2.18 | v19.58,110.77 v27.89,102.46
  Bottom 0.406: 15.16,120.6 13.87,120.6 12.5,119.23 10.59,119.23 10.06,119.76 10.06,122.96 IC2.3 | 15.16,120.6 16.31,120.6 317CAP4.1 | v30.4,86.54 30.4,92.33 27.89,94.84 v27.89,102.46 | v19.58,110.77 19.58,111.38 15.16,115.8 15.16,120.6
3.3V3  (via drill 0.61)
  Top 0.406: v21.26,20.73 21.64,20.34 26.67,20.34 SV1.2
  Bottom 0.406: IC6.4 8.76,42.6 8.76,43.13 317CAP12.1 | IC6.4 | R11.1 4.5,39.93 11.2,39.93 IC6.4 | v21.26,20.73 21.26,30.02 11.51,39.78 IC6.4
3.3V3_EN  (via drill 0.61)
  Top 0.406: S1.17 34.29,3.12 27.89,9.53 23.32,9.53 13.26,19.58 13.26,24.23 v13.87,24.84
  Bottom 0.406: 15.7,26.52 15.7,27.66 14.86,28.5 14.86,35.05 14.55,35.36 10.67,35.36 9.07,33.76 IC6.3 | 15.7,26.52 15.7,25.45 317CAP11.1 | v13.87,24.84 15.54,26.52 15.7,26.52
3.3V3_EN1  (via drill 0.61)
  Top 0.406: S2.17 34.29,80.59 27.89,87 23.32,87 13.26,97.05 13.26,101.7 v13.87,102.31
  Bottom 0.406: 15.7,103.99 15.7,105.13 14.86,105.97 14.86,112.52 14.55,112.83 10.67,112.83 9.07,111.23 IC3.3 | 15.7,103.99 15.7,102.92 317CAP6.1 | v13.87,102.31 15.54,103.99 15.7,103.99
3.3V4  (via drill 0.61)
  Top 0.406: v21.26,98.2 21.64,97.81 26.67,97.81 SV5.2
  Bottom 0.406: IC3.4 8.76,120.07 8.76,120.6 317CAP7.1 | IC3.4 | R6.1 4.5,117.4 11.2,117.4 IC3.4 | v21.26,98.2 21.26,107.49 11.51,117.25 IC3.4
3.3V5  (via drill 0.61)
  Top 0.406: v14.25,99.19 29.57,99.19 30.94,97.81 31.7,97.81 SV5.6
  Bottom 0.406: 317CAP2.1 8.69,102.84 7.09,102.84 4.5,100.25 R2.1 4.34,100.03 4.34,98.96 3.05,97.66 3.05,95.68 3.35,95.38 7.16,95.38 11.28,99.49 IC1.4 11.43,99.57 11.81,99.19 v14.25,99.19
3.3V6  (via drill 0.61)
  Top 0.406: v27.89,120.52 18.82,129.59 v14.25,129.59
  Bottom 0.406: 317CAP5.1 8.76,133.93 8.76,132.79 11.43,130.12 IC2.4 | R4.1 4.5,130.73 10.59,130.73 IC2.4 | v27.89,120.52 27.89,104.98 29.18,103.68 29.18,97.81 SV5.4 | v14.25,129.59 11.96,129.59 11.58,129.97 IC2.4
5V
  Top 0.254: OUT_OK.A 144.75,13.56 139.42,18.9 139.42,19.05
  Top 2.54: D3.C 88.9,19.05
  Bottom 2.54: C49.+ S3.2 S3.5
  pour Top: 78.74,74.93 152.4,74.93 152.4,19.05 78.74,19.05 78.74,73.66
5V1  (via drill 0.61)
  Top 0.406: v45.72,26.67 49.99,26.67 62.41,39.09 v62.41,41.99
  Bottom 0.406: C2.1 70.94,52.12 70.94,52.35 68.96,54.33 63.09,54.33 62.87,54.1 62.87,47.47 63.7,46.63 63.7,43.51 PWR_1.2 63.7,43.28 v62.41,41.99 | v45.72,26.67 SV1.12
5V1_EN  (via drill 0.61)
  Top 0.406: v48.54,4.8 47.02,3.28 47.02,2.67 S1.22 | v53.19,4.95 53.19,8.84 53.87,9.53 v53.87,21.41
  Bottom 0.406: C1.1 70.94,44.42 70.03,43.51 68.35,43.51 PWR_1.1 68.12,43.43 66.22,43.43 53.87,31.09 v53.87,21.41 | v48.54,4.8 53.03,4.8 v53.19,4.95
5V1_EN1  (via drill 0.61)
  Top 0.406: v48.54,82.27 47.02,80.75 47.02,80.14 S2.22 | v53.19,82.42 53.19,86.31 53.87,87 v53.87,98.88
  Bottom 0.406: C7.1 70.94,121.89 70.03,120.98 68.35,120.98 PWR_4.1 68.12,120.9 66.22,120.9 53.87,108.56 v53.87,98.88 | v48.54,82.27 53.03,82.27 v53.19,82.42
5V2  (via drill 0.61)
  Top 0.406: v70.33,36.12 v66.37,32.16 | v57.38,23.09 40.39,23.09 37.64,20.34 36.88,20.34 SV1.10
  Bottom 0.406: v66.37,32.16 63.78,29.57 PWR_2.2 63.63,29.34 v57.38,23.09 | v70.33,36.12 70.33,37.49 70.94,38.1 C4.1
5V2_EN  (via drill 0.61)
  Top 0.406: v47.09,4.88 46.71,4.88 44.5,2.67 S1.21 | v54.63,3.66 57.68,3.66 69.42,15.39 v69.42,27.81
  Bottom 0.406: 69.3,31.2 69.95,31.85 72.39,31.85 73.76,30.48 C3.1 | 69.3,31.2 68.35,30.25 68.35,29.57 PWR_2.1 | v47.09,4.88 48.31,3.66 v54.63,3.66 | v69.42,27.81 69.42,31.09 69.3,31.2
5V2_EN1  (via drill 0.61)
  Top 0.406: v47.09,82.35 46.71,82.35 44.5,80.14 S2.21 | v54.63,81.13 57.68,81.13 69.42,92.86 v69.42,105.28
  Bottom 0.406: 69.3,108.67 69.95,109.32 72.39,109.32 73.76,107.95 C9.1 | 69.3,108.67 68.35,107.72 68.35,107.04 PWR_5.1 | v47.09,82.35 48.31,81.13 v54.63,81.13 | v69.42,105.28 69.42,108.56 69.3,108.67
5V3  (via drill 0.61)
  Top 0.406: v63.7,18.14 57.76,24.08 38.86,24.08 35.13,20.34 34.29,20.34 SV1.8
  Bottom 0.406: C6.1 70.94,24.08 70.94,21.26 65.23,15.54 63.78,15.54 PWR_3.2 63.7,15.7 v63.7,18.14
5V3_EN  (via drill 0.61)
  Top 0.406: v47.85,5.94 45.34,5.94 42.06,2.67 41.91,2.67 S1.20 | v55.55,5.94 58.6,5.94 v66.9,14.25
  Bottom 0.406: C5.1 70.94,16.46 70.03,15.54 68.35,15.54 PWR_3.1 68.12,15.47 v66.9,14.25 | v55.55,5.94 v47.85,5.94
5V3_EN1  (via drill 0.61)
  Top 0.406: v47.85,83.41 45.34,83.41 42.06,80.14 41.91,80.14 S2.20 | v55.55,83.41 58.6,83.41 v66.9,91.72
  Bottom 0.406: C12.1 70.94,93.93 70.03,93.02 68.35,93.02 PWR_6.1 68.12,92.94 v66.9,91.72 | v55.55,83.41 v47.85,83.41
5V4  (via drill 0.61)
  Top 0.406: v63.7,95.61 57.76,101.55 38.86,101.55 35.13,97.81 34.29,97.81 SV5.8
  Bottom 0.406: C11.1 70.94,101.55 70.94,98.73 65.23,93.02 63.78,93.02 PWR_6.2 63.7,93.17 v63.7,95.61
5V5  (via drill 0.61)
  Top 0.406: v70.33,113.59 v66.37,109.63 | v57.38,100.56 40.39,100.56 37.64,97.81 36.88,97.81 SV5.10
  Bottom 0.406: v66.37,109.63 63.78,107.04 PWR_5.2 63.63,106.81 v57.38,100.56 | v70.33,113.59 70.33,114.96 70.94,115.57 C10.1
5V6  (via drill 0.61)
  Top 0.406: v45.72,104.14 49.99,104.14 62.41,116.56 v62.41,119.46
  Bottom 0.406: C8.1 70.94,129.59 70.94,129.82 68.96,131.8 63.09,131.8 62.87,131.57 62.87,124.94 63.7,124.1 63.7,120.98 PWR_4.2 63.7,120.75 v62.41,119.46 | v45.72,104.14 SV5.12
5V7
  Top 0.254: OUT_OK1.A 144.75,91.03 139.42,96.37 139.42,96.52
  Top 2.54: D4.C 88.9,96.52
  Bottom 2.54: C89.+ S4.2 S4.5
  pour Top: 78.74,152.4 152.4,152.4 152.4,96.52 78.74,96.52 78.74,151.13
12V  (via drill 0.89)
  Top 1.27: v61.49,58.14 64.77,61.42 LED1.A | SV1.18 47.02,20.34 49.53,20.34 SV1.20 49.91,19.81 51.21,18.52 51.21,11.2 | S1.11 24.16,11.2 S1.12 | S1.11 | S1.11 29.18,11.2 | 29.18,11.2 S1.10 | 29.18,11.2 31.7,11.2 S1.9 32.38,11.2 S1.8 | S1.8 | S1.8 36.8,11.2 | 36.8,11.2 S1.7 | 36.8,11.2 39.32,11.2 S1.6 40.01,11.2 S1.5 | S1.5 | S1.5 44.42,11.2 | 44.42,11.2 S1.4 | 44.42,11.2 46.94,11.2 S1.3 47.62,11.2 S1.2 | S1.2 | S1.2 51.21,11.2 | 51.21,11.2 52.05,11.2 S1.1
  Bottom 1.27: v61.49,58.14 51.21,58.14 | 51.21,58.14 50.67,58.14 47.62,61.19 D1.C | 51.21,58.14 51.21,22.02 49.53,20.34 SV1.20
12V1  (via drill 0.89)
  Top 1.27: v61.49,135.61 64.77,138.89 LED2.A | SV5.18 47.02,97.81 49.53,97.81 SV5.20 49.91,97.28 51.21,95.99 51.21,88.67 | S2.11 24.16,88.67 S2.12 | S2.11 | S2.11 29.18,88.67 | 29.18,88.67 S2.10 | 29.18,88.67 31.7,88.67 S2.9 32.38,88.67 S2.8 | S2.8 | S2.8 36.8,88.67 | 36.8,88.67 S2.7 | 36.8,88.67 39.32,88.67 S2.6 40.01,88.67 S2.5 | S2.5 | S2.5 44.42,88.67 | 44.42,88.67 S2.4 | 44.42,88.67 46.94,88.67 S2.3 47.62,88.67 S2.2 | S2.2 | S2.2 51.21,88.67 | 51.21,88.67 52.05,88.67 S2.1
  Bottom 1.27: v61.49,135.61 51.21,135.61 | 51.21,135.61 50.67,135.61 47.62,138.66 D2.C | 51.21,135.61 51.21,99.49 49.53,97.81 SV5.20
12V1_EN
  Top 0.406: S1.24 52.12,2.67 52.12,8.76 53.19,9.83 53.19,18.44 50.06,21.57 45.72,21.57 44.5,20.34 SV1.16
12V1_EN1
  Top 0.406: S2.24 52.12,80.14 52.12,86.23 53.19,87.3 53.19,95.91 50.06,99.03 45.72,99.03 44.5,97.81 SV5.16
12V2_EN  (via drill 0.61)
  Top 0.406: v49.53,8.91 S1.23
  Bottom 0.406: v49.53,8.91 49.53,10.97 43.13,17.37 43.13,19.05 41.91,20.27 SV1.14
12V2_EN1  (via drill 0.61)
  Top 0.406: v49.53,86.39 S2.23
  Bottom 0.406: v49.53,86.39 49.53,88.44 43.13,94.84 43.13,96.52 41.91,97.74 SV5.14
24V
  Top 0.406: LED3.A 173.48,36.83 173.48,39.88 172.21,41.15 172.21,45.21 C95.+ 173.23,46.35 167.64,51.94 X3.3 167.51,51.82 166.12,51.82 C96.+ 156.84,42.55 156.84,21.97 157.73,21.08 157.73,18.16 IC7.1
24V1
  Top 0.406: LED11.A 174.75,114.3 174.75,117.35 173.48,118.62 173.48,122.68 C99.+ 174.5,123.83 168.91,129.41 X4.3 168.78,129.29 167.39,129.29 C100.+ 158.12,120.02 158.12,99.44 159,98.55 159,95.63 IC9.1
+5V
  Top 0.406: IC7.2 162.31,18.16 165.48,18.16 165.74,18.41 HIGH.3 165.86,18.67 165.86,22.1 IC8.4 166.62,22.23 167.64,21.21 171.32,21.21 171.83,21.72 171.83,25.27 171.07,26.04 IC8.8
+5V1
  Top 0.406: IC9.2 163.58,95.63 166.75,95.63 167,95.89 HIGH1.3 167.13,96.14 167.13,99.57 IC10.4 167.89,99.69 168.91,98.68 172.59,98.68 173.1,99.19 173.1,102.74 172.34,103.5 IC10.8
GND  (via drill 0.61)
  Top 0.406: U$2.9 60.05,67.28 60.05,62.26 U$2.7 59.89,62.18 59.13,62.18 56.96,60.01 | SV4.1 26.67,48.31 29.18,48.31 SV4.3 29.41,48.23 31.7,48.23 SV4.5 31.93,48.31 34.29,48.31 SV4.7 34.44,48.31 36.8,48.31 SV4.9 37.03,48.23 39.32,48.23 SV4.11 39.55,48.31 41.91,48.31 SV4.13 42.06,48.31 44.42,48.31 SV4.15 44.65,48.23 46.94,48.23 SV4.17 47.17,48.31 48.31,48.31 | 48.31,48.31 49.53,48.31 SV4.19 49.61,48.08 49.61,42.29 50.75,41.15 50.75,39.4 49.61,38.25 SV3.19 SV3.17 SV3.15 SV3.13 SV3.11 SV3.9 SV3.7 SV3.5 SV3.3 SV3.1 26.59,37.95 26.59,32.16 25.45,31.01 25.45,29.26 26.59,28.12 SV2.1 26.67,27.96 29.18,27.96 SV2.3 29.34,27.96 31.7,27.96 SV2.5 31.93,27.96 33.07,27.96 | 56.96,60.01 48.31,51.36 48.31,48.31 | SV1.1 26.67,17.83 29.18,17.83 SV1.3 | 33.07,27.96 34.29,27.96 SV2.7 34.44,27.96 36.8,27.96 SV2.9 36.96,27.96 39.32,27.96 SV2.11 39.55,27.96 41.91,27.96 SV2.13 42.06,27.96 44.42,27.96 SV2.15 44.58,27.96 46.94,27.96 SV2.17 47.17,27.96 49.53,27.96 SV2.19 | SV1.19 49.53,17.83 47.17,17.83 SV1.17 46.94,17.83 44.5,17.83 SV1.15 44.27,17.83 41.91,17.83 SV1.13 | 33.07,19.05 33.07,27.96 | 33.07,19.05 34.29,17.83 SV1.7 | SV1.5 31.77,17.83 32.92,18.97 33.07,19.05 | 56.96,60.01 v53.42,63.55
  Bottom 0.406: 53.19,63.55 53.19,65.99 V7805_C5.2 53.19,66.22 53.19,69.19 | 53.19,63.55 53.19,61.65 V7805_C6.2 | 53.19,69.19 53.19,70.48 V7805_C4.2 | 53.19,69.19 39.4,69.19 12V_INPUT.2 39.24,69.19 24.31,69.19 TS7800_CON.2 | R12.2 4.42,36.35 4.42,36.5 2.36,38.56 2.36,47.55 4.42,49.61 R10.2 | SV1.3 29.26,17.75 31.47,17.75 SV1.5 | C4.2 73.76,38.1 73.76,44.42 C1.2 | SV1.7 34.29,17.83 36.65,17.83 SV1.9 37.11,17.75 39.32,17.75 SV1.11 39.55,17.83 41.91,17.83 SV1.13 | v53.42,63.55 53.19,63.55
  pour Top: 1.27,74.93 74.93,74.93 74.93,1.27 1.27,1.27
  pour Bottom: 1.27,74.93 74.93,74.93 74.93,1.27 1.27,1.27
GND1  (via drill 0.61)
  Top 0.406: U$1.9 60.05,144.75 60.05,139.72 U$1.7 59.89,139.65 59.13,139.65 56.96,137.48 | SV8.1 26.67,125.78 29.18,125.78 SV8.3 29.41,125.7 31.7,125.7 SV8.5 31.93,125.78 34.29,125.78 SV8.7 34.44,125.78 36.8,125.78 SV8.9 37.03,125.7 39.32,125.7 SV8.11 39.55,125.78 41.91,125.78 SV8.13 42.06,125.78 44.42,125.78 SV8.15 44.65,125.7 46.94,125.7 SV8.17 47.17,125.78 48.31,125.78 | 48.31,125.78 49.53,125.78 SV8.19 49.61,125.55 49.61,119.76 50.75,118.62 50.75,116.86 49.61,115.72 SV7.19 SV7.17 SV7.15 SV7.13 SV7.11 SV7.9 SV7.7 SV7.5 SV7.3 SV7.1 26.59,115.42 26.59,109.63 25.45,108.48 25.45,106.73 26.59,105.59 SV6.1 26.67,105.44 29.18,105.44 SV6.3 29.34,105.44 31.7,105.44 SV6.5 31.93,105.44 33.07,105.44 | 56.96,137.48 48.31,128.83 48.31,125.78 | SV5.1 26.67,95.3 29.18,95.3 SV5.3 | 33.07,105.44 34.29,105.44 SV6.7 34.44,105.44 36.8,105.44 SV6.9 36.96,105.44 39.32,105.44 SV6.11 39.55,105.44 41.91,105.44 SV6.13 42.06,105.44 44.42,105.44 SV6.15 44.58,105.44 46.94,105.44 SV6.17 47.17,105.44 49.53,105.44 SV6.19 | SV5.19 49.53,95.3 47.17,95.3 SV5.17 46.94,95.3 44.5,95.3 SV5.15 44.27,95.3 41.91,95.3 SV5.13 | 33.07,96.52 33.07,105.44 | 33.07,96.52 34.29,95.3 SV5.7 | SV5.5 31.77,95.3 32.92,96.44 33.07,96.52 | 56.96,137.48 v53.42,141.02
  Bottom 0.406: 53.19,141.02 53.19,143.46 V7805_C2.2 53.19,143.69 53.19,146.66 | 53.19,141.02 53.19,139.12 V7805_C3.2 | 53.19,146.66 53.19,147.96 V7805_C1.2 | 53.19,146.66 39.4,146.66 12V_INPUT1.2 39.24,146.66 24.31,146.66 TS7800_CON1.2 | R13.2 4.42,113.82 4.42,113.97 2.36,116.03 2.36,125.02 4.42,127.08 R5.2 | SV5.3 29.26,95.22 31.47,95.22 SV5.5 | C10.2 73.76,115.57 73.76,121.89 C7.2 | SV5.7 34.29,95.3 36.65,95.3 SV5.9 37.11,95.22 39.32,95.22 SV5.11 39.55,95.3 41.91,95.3 SV5.13 | v53.42,141.02 53.19,141.02
  pour Top: 1.27,152.4 74.93,152.4 74.93,78.74 1.27,78.74
  pour Bottom: 1.27,152.4 74.93,152.4 74.93,78.74 1.27,78.74
GND2  (via drill 0.61)
  Top 0.254: v80.01,19.89 80.01,21.41 1.1 | 160.1 151.08,33.15 147.42,33.15 146.05,31.77 C45.-
  Top 2.54: R15.2 120.78,25.27 C49.-
  Bottom 2.54: OUTPUT.2 136.53,6.99 139.7,10.16 139.7,19.05 | INPUT.1 96.52,6.35 100.33,10.16 100.33,19.05
  pour Bottom: 78.74,74.93 152.4,74.93 152.4,19.05 78.74,19.05
GND3  (via drill 0.61)
  Top 0.254: v80.01,97.36 80.01,98.88 3.1 | 2.1 151.08,110.62 147.42,110.62 146.05,109.25 C85.-
  Top 2.54: R16.2 120.78,102.73 C89.-
  Bottom 2.54: OUTPUT1.2 136.53,84.45 139.7,87.63 139.7,96.52 | INPUT1.1 96.52,83.82 100.33,87.63 100.33,96.52
  pour Bottom: 78.74,152.4 152.4,152.4 152.4,96.52 78.74,96.52
GND4
  pour Bottom: 179.07,67.31 156.21,67.31 156.21,1.27 179.07,1.27
  pour Top: 179.07,67.31 156.21,67.31 156.21,1.27 179.07,1.27
GND5
  pour Bottom: 180.34,144.78 157.48,144.78 157.48,78.74 180.34,78.74
  pour Top: 180.34,144.78 157.48,144.78 157.48,78.74 180.34,78.74
N$1  (via drill 0.61)
  Top 0.406: v61.42,65.15 61.42,61.04 60.12,59.74 U$2.6
  Bottom 0.406: v61.42,65.15 56.08,70.48 V7805_C4.1
N$2
  Top 0.406: LED1.C 64.77,57.99 68.35,57.99 68.58,58.22 R1.1
N$3
  Bottom 1.27: 12V_INPUT.1 D1.A
N$4
  Bottom 0.406: IC1.1 13.79,93.47 12.27,95 8.31,95 7.16,93.85 4.5,93.85 R3.1 4.27,93.93 3.81,93.93 2.36,95.38 2.36,100.48 4.42,102.54 4.42,103 R2.2
N$5  (via drill 0.61)
  Top 0.406: v6.4,124.48 v6.4,133.48
  Bottom 0.406: 6.4,124.33 7.16,124.33 8.31,125.48 12.27,125.48 13.79,123.95 IC2.1 | 6.4,124.33 4.5,124.33 R5.1 | v6.4,133.48 4.5,133.48 R4.2 | v6.4,124.48 6.4,124.33
N$6
  Bottom 0.406: 5.87,110.92 7.01,110.92 8.31,109.63 12.27,109.63 13.79,111.15 IC3.1 | 5.87,110.92 4.5,110.92 R13.1 | 5.87,110.92 5.87,114.81 5.56,115.11 4.27,115.11 3.05,116.33 3.05,118.31 4.42,119.69 4.42,120.14 R6.2
N$7  (via drill 0.61)
  Top 0.406: v61.42,142.62 61.42,138.51 60.12,137.21 U$1.6
  Bottom 0.406: v61.42,142.62 56.08,147.96 V7805_C1.1
N$8
  Top 0.406: LED2.C 64.77,135.46 68.35,135.46 68.58,135.69 R14.1
N$9
  Bottom 1.27: 12V_INPUT1.1 D2.A
N$10
  Top 0.254: OUT_OK.C 144.83,16.99 144.83,17.68 148.87,21.72 148.87,28.04 151.16,30.33 160.2
N$11
  Top 2.54: OUTPUT.1 125.09,13.34 S3.3
  Bottom 2.54: S3.3 S3.4
N$12
  Bottom 0.406: IC4.1 13.79,16 12.27,17.53 8.31,17.53 7.16,16.38 4.5,16.38 R8.1 4.27,16.46 3.81,16.46 2.36,17.91 2.36,23.01 4.42,25.07 4.42,25.53 R7.2
N$13  (via drill 0.61)
  Top 0.406: v6.4,47.02 v6.4,56.01
  Bottom 0.406: 6.4,46.86 7.16,46.86 8.31,48.01 12.27,48.01 13.79,46.48 IC5.1 | 6.4,46.86 4.5,46.86 R10.1 | v6.4,56.01 4.5,56.01 R9.2 | v6.4,47.02 6.4,46.86
N$14
  Bottom 0.406: 5.87,33.45 7.01,33.45 8.31,32.16 12.27,32.16 13.79,33.68 IC6.1 | 5.87,33.45 4.5,33.45 R12.1 | 5.87,33.45 5.87,37.34 5.56,37.64 4.27,37.64 3.05,38.86 3.05,40.84 4.42,42.22 4.42,42.67 R11.2
N$15
  Top 0.254: IN_OK.A 150.93,15.85 149.86,15.85 143.23,9.22 99.72,9.22 97.59,11.35 INPUT.2 | X1.1 81.51,15.24 83.41,13.34 87.68,13.34 D3.A
  Top 2.54: D3.A 95.25,13.34 INPUT.2
N$16
  Top 2.54: R15.1 114.3,17.78 S3.1
  Bottom 2.54: S3.1 S3.6
N$17
  Top 0.254: IN_OK.C 147.42,15.85 147.42,14.1 143,9.68 102.08,9.68 96.29,15.47 88.29,15.47 82.58,21.18 81.31,22.4 80.01,23.7 80.01,24.23 1.2
N$18
  Top 0.254: OUT_OK1.C 144.83,94.46 144.83,95.15 148.87,99.19 148.87,105.51 151.16,107.8 2.2
N$19
  Top 2.54: OUTPUT1.1 125.09,90.81 S4.3
  Bottom 2.54: S4.3 S4.4
N$20
  Top 0.254: IN_OK1.A 150.93,93.32 149.86,93.32 143.23,86.69 99.72,86.69 97.59,88.82 INPUT1.2 | X2.1 81.51,92.71 83.41,90.81 87.68,90.81 D4.A
  Top 2.54: D4.A 95.25,90.81 INPUT1.2
N$21
  Top 2.54: R16.1 114.3,95.25 S4.1
  Bottom 2.54: S4.1 S4.6
N$22
  Top 0.254: IN_OK1.C 147.42,93.32 147.42,91.57 143,87.15 102.08,87.15 96.29,92.94 88.29,92.94 82.58,98.65 81.31,99.87 80.01,101.17 80.01,101.7 3.2
N$23
  Top 0.406: LED3.C 176.91,36.83 176.91,36.32 173.61,33.02 LED4.A
N$24
  Top 0.406: LED5.A 173.61,29.21 173.61,29.72 176.91,33.02 LED4.C
N$25
  Top 0.406: LED5.C 176.91,29.21 176.91,28.7 173.61,25.4 LED6.A
N$26
  Top 0.406: LED7.A 173.61,21.59 173.61,22.1 176.91,25.4 LED6.C
N$27
  Top 0.406: LED7.C 176.91,21.59 176.91,21.08 173.61,17.78 LED9.A
N$28
  Top 0.406: LED8.A 173.61,13.97 173.61,14.48 176.91,17.78 LED9.C
N$29
  Top 0.406: LED8.C 176.91,13.97 176.91,13.46 173.61,10.16 LED10.A
N$30
  Top 0.406: 1K.2 175.26,7.62 176.91,9.27 176.91,10.16 LED10.C
N$31
  Top 0.406: 169.42,27.94 169.42,27.3 168.66,26.54 168.66,25.53 169.42,24.77 IC8.7 | 169.42,27.94 169.42,29.72 LOW.3 | 169.42,27.94 174.5,27.94 174.75,28.19 174.75,29.21 176.02,30.48 177.93,30.48 178.31,30.1 178.31,24.51 177.93,24.13 177.29,24.13 175.77,22.61 175.77,21.59 174.5,20.32 173.86,20.32 168.15,14.61 167.64,14.61 HIGH.2
N$32
  Top 0.406: 166.62,24.77 168.15,24.77 169.42,23.5 IC8.6 | 166.62,24.77 IC8.2 | C93.1 162.56,34.04 165.74,30.86 165.74,29.84 LOW.1 165.86,29.59 166.62,28.83 166.62,24.77
N$33  (via drill 0.61)
  Top 0.406: C94.1 164.97,15.24 167,17.27 v167,20.45 | IC8.5 v168.02,22.23
  Bottom 0.406: v167,20.45 168.02,21.46 v168.02,22.23
N$34
  Top 0.406: U$3.3 172.72,6.35 173.35,6.99 1K.3
N$35
  Top 0.406: IC8.3 164.21,23.5 163.45,22.73 163.45,22.23 161.29,20.07 161.29,14.22 167.77,7.75 167.77,7.37 U$3.1
N$36
  Top 0.406: LED11.C 178.18,114.3 178.18,113.79 174.88,110.49 LED12.A
N$37
  Top 0.406: LED13.A 174.88,106.68 174.88,107.19 178.18,110.49 LED12.C
N$38
  Top 0.406: LED13.C 178.18,106.68 178.18,106.17 174.88,102.87 LED14.A
N$39
  Top 0.406: LED15.A 174.88,99.06 174.88,99.57 178.18,102.87 LED14.C
N$40
  Top 0.406: LED15.C 178.18,99.06 178.18,98.55 174.88,95.25 LED17.A
N$41
  Top 0.406: LED16.A 174.88,91.44 174.88,91.95 178.18,95.25 LED17.C
N$42
  Top 0.406: LED16.C 178.18,91.44 178.18,90.93 174.88,87.63 LED18.A
N$43
  Top 0.406: 1K1.2 176.53,85.09 178.18,86.74 178.18,87.63 LED18.C
N$44
  Top 0.406: 170.69,105.41 170.69,104.78 169.93,104.01 169.93,103 170.69,102.23 IC10.7 | 170.69,105.41 170.69,107.19 LOW1.3 | 170.69,105.41 175.77,105.41 176.02,105.66 176.02,106.68 177.29,107.95 179.2,107.95 179.58,107.57 179.58,101.98 179.2,101.6 178.56,101.6 177.04,100.08 177.04,99.06 175.77,97.79 175.13,97.79 169.42,92.08 168.91,92.08 HIGH1.2
N$45
  Top 0.406: 167.89,102.23 169.42,102.23 170.69,100.97 IC10.6 | 167.89,102.23 IC10.2 | C97.1 163.83,111.51 167,108.33 167,107.31 LOW1.1 167.13,107.06 167.89,106.3 167.89,102.23
N$46  (via drill 0.61)
  Top 0.406: C98.1 166.24,92.71 168.28,94.74 v168.28,97.92 | IC10.5 v169.29,99.69
  Bottom 0.406: v168.28,97.92 169.29,98.93 v169.29,99.69
N$47
  Top 0.406: U$4.3 173.99,83.82 174.62,84.45 1K1.3
N$48
  Top 0.406: IC10.3 165.48,100.97 164.72,100.2 164.72,99.69 162.56,97.54 162.56,91.69 169.04,85.22 169.04,84.84 U$4.1
TS7800_+  (via drill 0.89)
  Top 1.27: v51.28,59.74 49.23,59.74 U$2.5 48.54,59.82 27.2,59.82 24.16,62.87 TS7800_CON.1
  Bottom 1.27: v51.28,59.74 54.33,59.74 56.01,61.42 56.01,61.57 V7805_C6.1
TS7800_+1  (via drill 0.89)
  Top 1.27: v51.28,137.21 49.23,137.21 U$1.5 48.54,137.29 27.2,137.29 24.16,140.34 TS7800_CON1.1
  Bottom 1.27: v51.28,137.21 54.33,137.21 56.01,138.89 56.01,139.04 V7805_C3.1
TS7800_EN  (via drill 0.89)
  Top 1.27: v54.33,68.2 50.83,68.2 49.23,69.8 U$2.1 48.69,69.42 45.64,66.37 23.62,66.37 9.68,52.43 9.68,8.46 16.46,1.68 22.4,1.68 23.32,2.59 24.08,2.59 S1.13
  Bottom 1.27: v54.33,68.2 56.01,66.52 56.01,66.06 V7805_C5.1
TS7800_EN1  (via drill 0.89)
  Top 1.27: v54.33,145.67 50.83,145.67 49.23,147.27 U$1.1 48.69,146.89 45.64,143.84 23.62,143.84 9.68,129.9 9.68,85.93 16.46,79.15 22.4,79.15 23.32,80.06 24.08,80.06 S2.13
  Bottom 1.27: v54.33,145.67 56.01,143.99 56.01,143.53 V7805_C2.1
VREF1  (via drill 0.61)
  Top 0.406: SV3.20 49.53,40.69 47.17,40.69 SV3.18 46.94,40.62 44.65,40.62 SV3.16 44.42,40.69 42.06,40.69 SV3.14 41.91,40.69 39.55,40.69 SV3.12 39.32,40.62 37.03,40.62 SV3.10 36.8,40.69 34.44,40.69 SV3.8 34.29,40.69 31.93,40.69 SV3.6 31.7,40.62 29.41,40.62 SV3.4 29.18,40.69 26.67,40.69 SV3.2 26.52,40.54 25.45,40.54 12.57,27.66 12.57,14.86 v20.42,7.01
  Bottom 0.406: 20.31,6.06 23.09,3.28 37.11,3.28 40.54,6.71 40.54,7.62 41.91,8.99 6103CAP8.1 | 20.31,6.06 20.19,6.17 18.75,6.17 3V3.2 | v20.42,7.01 20.42,6.17 20.31,6.06
VREF1_EN  (via drill 0.61)
  Top 0.406: v27.96,8.08 28.35,8.08 31.7,4.72 31.7,2.67 S1.16 | v55.47,4.65 54.56,5.56 54.56,20.73 54.86,21.03 54.86,21.79 54.25,22.4 42.22,22.4 40.62,20.8 40.62,17.3 36.8,13.49 v29.41,13.49
  Bottom 0.406: 3V3.1 18.75,8.08 v27.96,8.08 28.04,8.23 29.41,9.6 v29.41,13.49 | v55.47,4.65 57,3.12 57,2.59 6103CAP7.1
VREF1_EN1  (via drill 0.61)
  Top 0.406: v27.96,85.55 28.35,85.55 31.7,82.19 31.7,80.14 S2.16 | v55.47,82.12 54.56,83.03 54.56,98.2 54.86,98.5 54.86,99.26 54.25,99.87 42.22,99.87 40.62,98.27 40.62,94.77 36.8,90.96 v29.41,90.96
  Bottom 0.406: 3V1.1 18.75,85.55 v27.96,85.55 28.04,85.7 29.41,87.07 v29.41,90.96 | v55.47,82.12 57,80.59 57,80.06 6103CAP1.1
VREF2
  Top 0.406: SV2.2 SV2.4 SV2.6 SV2.8 SV2.10 SV2.12 SV2.14 SV2.16 SV2.18 SV2.20
  Bottom 0.406: 3V4.2 36.65,6.71 35.36,6.71 33.07,8.99 6103CAP10.1 33.07,9.22 33.07,29.26 SV2.8
VREF2_EN  (via drill 0.61)
  Top 0.406: v30.48,4.57 30.48,3.89 29.26,2.67 S1.15 | v16.61,4.5 22.78,4.5 v23.01,4.72
  Bottom 0.406: 3V4.1 38.56,6.63 38.56,6.25 36.27,3.96 31.09,3.96 v30.48,4.57 30.4,4.72 v23.01,4.72 | v16.61,4.5 16.38,4.27 16.38,2.59 6103CAP9.1
VREF2_EN1  (via drill 0.61)
  Top 0.406: v30.48,82.04 30.48,81.36 29.26,80.14 S2.15 | v16.61,81.97 22.78,81.97 v23.01,82.19
  Bottom 0.406: 3V2.1 38.56,84.1 38.56,83.72 36.27,81.43 31.09,81.43 v30.48,82.04 30.4,82.19 v23.01,82.19 | v16.61,81.97 16.38,81.74 16.38,80.06 6103CAP3.1
VREF3
  Bottom 0.406: 48.31,49.53 48.31,19.81 49.07,19.05 54.56,19.05 61.27,12.34 61.27,7.85 59.44,6.02 3V5.2 | 48.31,49.53 49.53,50.75 SV4.20 | 48.31,49.53 48.16,49.61 47.02,50.75 SV4.18 46.79,50.83 44.58,50.83 SV4.16 44.42,50.83 42.06,50.83 SV4.14 41.91,50.83 39.55,50.83 SV4.12 39.32,50.83 36.96,50.83 SV4.10 36.8,50.83 34.44,50.83 SV4.8 34.29,50.83 31.93,50.83 SV4.6 31.7,50.83 29.34,50.83 SV4.4 29.18,50.83 26.82,50.83 SV4.2 26.67,50.75 25.45,49.53 25.45,23.09 16.38,14.02 6103CAP12.1
VREF3_EN  (via drill 0.61)
  Top 0.406: v57.53,9.45 v60.27,9.45 | v21.87,3.12 16.61,3.12 15.62,4.12 15.62,4.88 16.23,5.49 16.99,5.49 17.14,5.33 21.11,5.33 21.49,5.71 23.47,5.71 26.52,2.67 26.67,2.67 S1.14
  Bottom 0.406: v60.27,9.45 59.44,8.61 59.44,7.92 3V5.1 | 6103CAP11.1 57.07,11.43 57.53,10.97 v57.53,9.45 57.38,9.37 55.93,7.92 48.46,7.92 43.13,2.59 22.78,2.59 22.25,3.12 v21.87,3.12
VREF3_EN1  (via drill 0.61)
  Top 0.406: v57.53,86.92 v60.27,86.92 | v21.87,80.59 16.61,80.59 15.62,81.58 15.62,82.35 16.23,82.96 16.99,82.96 17.14,82.8 21.11,82.8 21.49,83.19 23.47,83.19 26.52,80.14 26.67,80.14 S2.14
  Bottom 0.406: v60.27,86.92 59.44,86.08 59.44,85.39 3V6.1 | 6103CAP5.1 57.07,88.9 57.53,88.44 v57.53,86.92 57.38,86.84 55.93,85.39 48.46,85.39 43.13,80.06 22.78,80.06 22.25,80.59 v21.87,80.59
VREF4  (via drill 0.61)
  Top 0.406: SV7.20 49.53,118.16 47.17,118.16 SV7.18 46.94,118.08 44.65,118.08 SV7.16 44.42,118.16 42.06,118.16 SV7.14 41.91,118.16 39.55,118.16 SV7.12 39.32,118.08 37.03,118.08 SV7.10 36.8,118.16 34.44,118.16 SV7.8 34.29,118.16 31.93,118.16 SV7.6 31.7,118.08 29.41,118.08 SV7.4 29.18,118.16 26.67,118.16 SV7.2 26.52,118.01 25.45,118.01 12.57,105.13 12.57,92.33 v20.42,84.48
  Bottom 0.406: 20.31,83.53 23.09,80.75 37.11,80.75 40.54,84.18 40.54,85.09 41.91,86.46 6103CAP2.1 | 20.31,83.53 20.19,83.64 18.75,83.64 3V1.2 | v20.42,84.48 20.42,83.64 20.31,83.53
VREF5
  Top 0.406: SV6.2 SV6.4 SV6.6 SV6.8 SV6.10 SV6.12 SV6.14 SV6.16 SV6.18 SV6.20
  Bottom 0.406: 3V2.2 36.65,84.18 35.36,84.18 33.07,86.46 6103CAP4.1 33.07,86.69 33.07,106.73 SV6.8
VREF6
  Bottom 0.406: 48.31,127 48.31,97.28 49.07,96.52 54.56,96.52 61.27,89.81 61.27,85.32 59.44,83.49 3V6.2 | 48.31,127 49.53,128.22 SV8.20 | 48.31,127 48.16,127.08 47.02,128.22 SV8.18 46.79,128.29 44.58,128.29 SV8.16 44.42,128.29 42.06,128.29 SV8.14 41.91,128.29 39.55,128.29 SV8.12 39.32,128.29 36.96,128.29 SV8.10 36.8,128.29 34.44,128.29 SV8.8 34.29,128.29 31.93,128.29 SV8.6 31.7,128.29 29.34,128.29 SV8.4 29.18,128.29 26.82,128.29 SV8.2 26.67,128.22 25.45,127 25.45,100.56 16.38,91.49 6103CAP6.1

## Text on the board
bNames: Solar Jackets Power Distribution Board / 12/7/2012 REV 4 | Solar Jackets Power Distribution Board / 12/7/2012 REV 4
tValues: - | + | v7805 | Pinout Header 1-3: / 1-19 ODD: GND / 2-20 EVEN: VREF | HEADER 1 | 1 | 2 | 3 | 4 | Pinout Header 4: / 1-19 ODD: GND / 2: 3.3V 3 / 4: 3.3V 2 / 6: 3.3V 1 / 8: 5V 3 / 10: 5V 2 / 12: 5V 1 / 14: 12V 2 / 16: 12V 1 / 18: 12V / 20: 12V | + | + | - | - | Switches: / 1: 12V 1 / 2: 12V 2 / 3: 5V 1 / 4: 5V 2 / 5: 5V 3 / 6: 3.3V 1 / 7: 3.3V 2 / 8: 3.3V 3 / 9: VREF 1 / 10: VREF 2 / 11: VREF 3 / 12: TS-7800 | - | + | v7805 | Pinout Header 1-3: / 1-19 ODD: GND / 2-20 EVEN: VREF | HEADER 1 | 1 | 2 | 3 | 4 | Pinout Header 4: / 1-19 ODD: GND / 2: 3.3V 3 / 4: 3.3V 2 / 6: 3.3V 1 / 8: 5V 3 / 10: 5V 2 / 12: 5V 1 / 14: 12V 2 / 16: 12V 1 / 18: 12V / 20: 12V | + | + | - | - | Switches: / 1: 12V 1 / 2: 12V 2 / 3: 5V 1 / 4: 5V 2 / 5: 5V 3 / 6: 3.3V 1 / 7: 3.3V 2 / 8: 3.3V 3 / 9: VREF 1 / 10: VREF 2 / 11: VREF 3 / 12: TS-7800
bValues: SOLAR JACKETS / TS-7800 POWER BANK / 2/25/13 REV1 | SOLAR JACKETS / TS-7800 POWER BANK / 2/25/13 REV1